# Altium PCB Main.PcbDoc (part 2 of 4)
Units mm, origin at the board's own origin, x right, y up, seen from the top; angles counter-clockwise.
Board outline 282.3 x 31.89 mm, 2 copper layers (Top Layer, Bottom Layer); 208 components, 197 nets, 886 pads, 366 vias.
Unrouted connection lines stored in the file: 118.
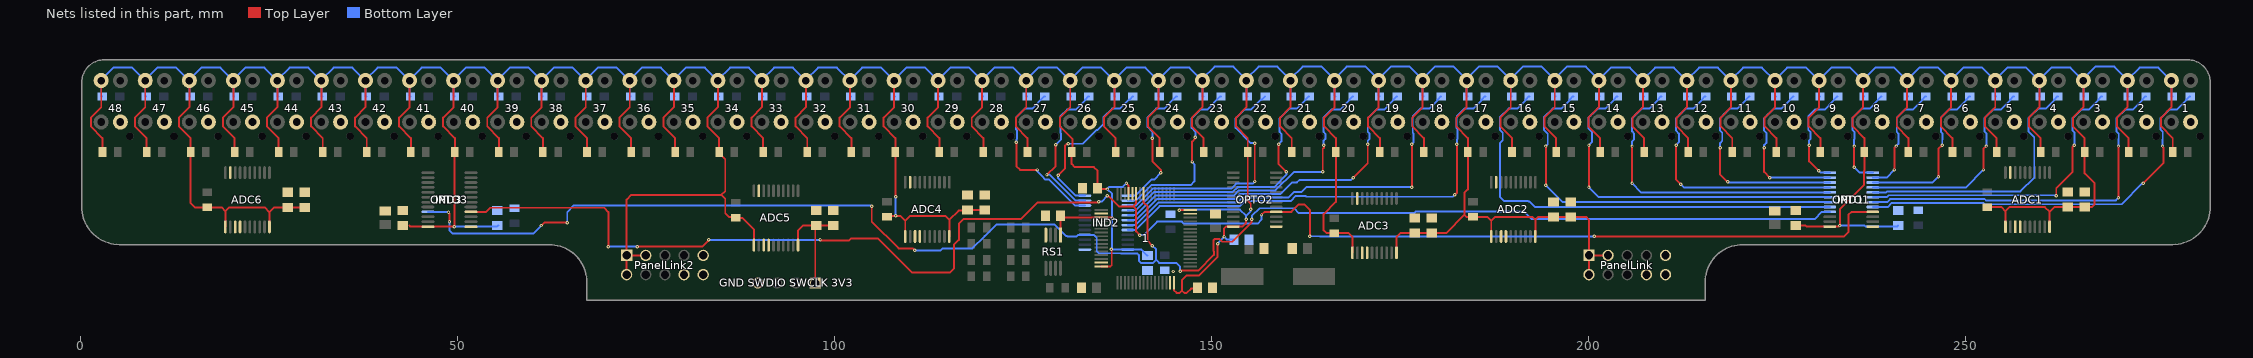
[diagram p2: the nets of this part, all layers, seen from the top]

## Footprints (in the part's own frame and the unit in brackets; to place one, negate y for a bottom-side part, rotate by r counter-clockwise, add the part's x,y. Pads: shape width x height; smd on the part's side, far side on the other; paste and mask are expansions set on the pad) (continued)
LQFP64 [mil]
  rect 10x70 smd: 1(-147.5,-232.34) 2(-127.82,-232.34) 3(-108.13,-232.34) 4(-88.45,-232.34) 5(-68.76,-232.34) 6(-49.08,-232.34) 7(-29.39,-232.34) 8(-9.71,-232.34) 9(9.98,-232.34) 10(29.66,-232.34) 11(49.35,-232.34) 12(69.03,-232.34) 13(88.72,-232.34) 14(108.4,-232.34) 15(128.09,-232.34) 16(147.77,-232.34) 33(147.77,232.34) 34(128.09,232.34) 35(108.4,232.34) 36(88.72,232.34) 37(69.03,232.34) 38(49.35,232.34) 39(29.66,232.34) 40(9.98,232.34) 41(-9.71,232.34) 42(-29.39,232.34) 43(-49.08,232.34) 44(-68.76,232.34) 45(-88.45,232.34) 46(-108.13,232.34) 47(-127.82,232.34) 48(-147.5,232.34)
  rect 70x10 smd: 17(232.34,-147.77) 18(232.34,-128.09) 19(232.34,-108.4) 20(232.34,-88.72) 21(232.34,-69.03) 22(232.34,-49.35) 23(232.34,-29.66) 24(232.34,-9.98) 25(232.34,9.71) 26(232.34,29.39) 27(232.34,49.08) 28(232.34,68.76) 29(232.34,88.45) 30(232.34,108.13) 31(232.34,127.82) 32(232.34,147.5) 49(-232.34,147.78) 50(-232.34,128.09) 51(-232.34,108.41) 52(-232.34,88.72) 53(-232.34,69.04) 54(-232.34,49.35) 55(-232.34,29.67) 56(-232.34,9.98) 57(-232.34,-9.7) 58(-232.34,-29.39) 59(-232.34,-49.07) 60(-232.34,-68.76) 61(-232.34,-88.44) 62(-232.34,-108.13) 63(-232.34,-127.81) 64(-232.34,-147.5)
  silkscreen extent -194,-292 191,193
NSOIC-8 [mm]
  rect 2x0.4 smd: 1(0,0)
  oval 2x0.4 smd: 2(0,-0.65) 3(0,-1.3) 4(0,-1.95) 5(4.4,-1.95) 6(4.4,-1.3) 7(4.4,-0.65) 8(4.4,0)
  silkscreen extent 1.27,-2.28 2.56,0.33
TCRT5000_NO_HOLE [mm]
  round 1 hole 1: 1(-4.65,-2.64)
  round 2 hole 1: A(2.75,1.17) C(-2.75,1.17) E(-2.75,-1.37) K(2.75,-1.37)
  silkscreen extent -5.35,-3.75 5.35,3.55, body extent -5.1,-3.65 5.1,3.35, height 7.02

## Part data
1: library part STM32F4R_64PIN_FOXCAR, Package=LQFP64, DeviceSetName=STM32F4R_64PIN_FOXCAR, GateName_1=G$1, LibraryName=stm32f4, SymbolName_1=STM32F4_64PINS_FOXCARV1
1 2 3 4 5 6 7 8 9 10 11 12 13 14 15 16 17 18 19 20 21 22 23 24 25 26 27 28 29 30 31 32 33 34 35 36 37 38 39 40 41 42 43 44 45 46 47 48: "Reflective Photo Interrupter, Phototransistor, Through Hole, 15 mm, 60 mA, 5 Vr, 1.25 Vf"
ADC1 ADC2 ADC3 ADC4 ADC5 ADC6: "Analogue to Digital Converter, Low Power, 8 bit, 50 kSPS, Single, 2.7 V, 5.5 V, SSOP"
C1 C1 C1 C2 C3 C3 C3 C3 C3 C3 C5 C6 C7 C7 C7 C8: library part "CAP 100nF", "Capacitor", Tolerance=+80%/-20%, Voltage=25V, Name="SMD Multilayer Ceramic Capacitor, 0805", Reference=1759167, Supplier=Farnell
C4 C4 C4 C4 C4 C4: library part "CAP 1uF", "Capacitor", Tolerance=+80%/-20%, Voltage=25V, Name="SMD Multilayer Ceramic Capacitor, 0805", Reference=1828853, Supplier=Farnell
C_quartz1 C_quartz2: library part "CAP 22pF", "Capacitor", Tolerance=5%, Voltage=50V, Name="SMD Multilayer Ceramic Capacitor, 0805", Reference=1759195, Supplier=Farnell
"GND SWDIO SWCLK 3V3": library part Connector_4pin, "4pin Connector"
IND1 IND2 IND3 OPTO1 OPTO2 OPTO3: "Led Driver, 16 Outputs, Constant Current, 3V-5.5V in, 30MHz switch, 20V/100mA out, TSSOP-24"
L1_IndicatorLED1 L1_IndicatorLED2 L1_IndicatorLED3 L1_IndicatorLED4 L1_IndicatorLED5 L1_IndicatorLED6 L1_IndicatorLED7 L1_IndicatorLED8 L1_IndicatorLED9 L1_IndicatorLED10 L1_IndicatorLED11 L1_IndicatorLED12 L1_IndicatorLED13 L1_IndicatorLED14 L1_IndicatorLED15 L1_IndicatorLED16 L1_IndicatorLED17 L1_IndicatorLED18 L1_IndicatorLED19 L1_IndicatorLED20 L1_IndicatorLED21 L1_IndicatorLED22 L1_IndicatorLED23 L1_IndicatorLED24 L1_IndicatorLED25 L1_IndicatorLED26 L1_IndicatorLED27 L1_IndicatorLED28 L1_IndicatorLED29 L1_IndicatorLED30 L1_IndicatorLED31 L1_IndicatorLED32 L1_IndicatorLED33 L1_IndicatorLED34 L1_IndicatorLED35 L1_IndicatorLED36 L1_IndicatorLED37 L1_IndicatorLED38 L1_IndicatorLED39 L1_IndicatorLED40 L1_IndicatorLED41 L1_IndicatorLED42 L1_IndicatorLED43 L1_IndicatorLED44 L1_IndicatorLED45 L1_IndicatorLED46 L1_IndicatorLED47 L1_IndicatorLED48: "LED, Low Power, Red, SMD, 2 mA, 1.95 V, 630 nm"
R1 R1 R1: library part "RES 8K2", "Resistor", Power=125mW, Tolerance=5%, Name="YAGEO (PHYCOMP)  RC0805JR-078K2L  SMD Chip Resistor, Thick Film, 8.2 kohm", Reference=9234128, Supplier=Farnell
R2_LightSensor1 R2_LightSensor2 R2_LightSensor3 R2_LightSensor4 R2_LightSensor5 R2_LightSensor6 R2_LightSensor7 R2_LightSensor8 R2_LightSensor9 R2_LightSensor10 R2_LightSensor11 R2_LightSensor12 R2_LightSensor13 R2_LightSensor14 R2_LightSensor15 R2_LightSensor16 R2_LightSensor17 R2_LightSensor18 R2_LightSensor19 R2_LightSensor20 R2_LightSensor21 R2_LightSensor22 R2_LightSensor23 R2_LightSensor24 R2_LightSensor25 R2_LightSensor26 R2_LightSensor27 R2_LightSensor28 R2_LightSensor29 R2_LightSensor30 R2_LightSensor31 R2_LightSensor32 R2_LightSensor33 R2_LightSensor34 R2_LightSensor35 R2_LightSensor36 R2_LightSensor37 R2_LightSensor38 R2_LightSensor39 R2_LightSensor40 R2_LightSensor41 R2_LightSensor42 R2_LightSensor43 R2_LightSensor44 R2_LightSensor45 R2_LightSensor46 R2_LightSensor47 R2_LightSensor48 R_boot: library part "RES 10K", "Resistor", Power=125mW, Tolerance=5%, Name="YAGEO (PHYCOMP)  RC0805JR-0710KL  SMD Chip Resistor, Thick Film, 10 kohm", Reference=9234136, Supplier=Farnell
R3 R3 R3: "RES, THICK FILM, 806R, 1%, 0.125W, 0805", Resistance="800 ohm"
R4: library part "RES 120R", "Resistor", Power=125mW, Tolerance=5%, Name="YAGEO (PHYCOMP)  RC0805JR-07120RL  SMD Chip Resistor, Thick Film, 120 ohm", Reference=9233890, Supplier=Farnell
R5 R7 R8 R9 R10 R11 R12 R13: library part RES, "Resistor"
R6 R6 R6 R6 R6 R6: library part "RES 1K", "Resistor", Power=125mW, Tolerance=5%, Name="YAGEO (PHYCOMP)  RC0805JR-071KL  SMD Chip Resistor, Thick Film, 1 kohm", Reference=9234004, Supplier=Farnell
RS1: library part ISL83071, "RS-422 transceiver 3V3"
X1: library part Crystal, "Quarz Crystal"

## Via types
v1: diameter 0.45, hole 0.2, Top Layer to Bottom Layer, 362 vias
v2: diameter 5.5, hole 3.2, Top Layer to Bottom Layer, 4 vias

## Nets (pads, with @x,y where several pads share a name; then routed paths per layer and width w, separated by ;. In a path a pad name is that pad's centre, name@x,y a point inside that pad or via, vN(x,y) a via of type N, cw(c..) or ccw(c..) an arc to the next point about the centre after c; other vN are vias at no path point)
3V3: 1.13 1.19 1.32 1.48 1.64 1.A 2.A 3.A 4.A 5.A 6.A 7.A 8.A 9.A 10.A 11.A 12.A 13.A 14.A 15.A 16.A 17.A 18.A 19.A 20.A 21.A 22.A 23.A 24.A 25.A 26.A 27.A 28.A 29.A 30.A 31.A 32.A 33.A 34.A 35.A 36.A 37.A 38.A 39.A 40.A 41.A 42.A 43.A 44.A 45.A 46.A 47.A 48.A "GND SWDIO SWCLK 3V3.1" ADC1.11 ADC1.20 ADC2.11 ADC2.20 ADC3.11 ADC3.20 ADC4.11 ADC4.20 ADC5.11 ADC5.20 ADC6.11 ADC6.20 C1.2 C2.2 C3.2 C4.2 C5.2 C6.1 C7.2 IND1.24 IND2.24 IND3.24 L1_IndicatorLED1.A L1_IndicatorLED2.A L1_IndicatorLED3.A L1_IndicatorLED4.A L1_IndicatorLED5.A L1_IndicatorLED6.A L1_IndicatorLED7.A L1_IndicatorLED8.A L1_IndicatorLED9.A L1_IndicatorLED10.A L1_IndicatorLED11.A L1_IndicatorLED12.A L1_IndicatorLED13.A L1_IndicatorLED14.A L1_IndicatorLED15.A L1_IndicatorLED16.A L1_IndicatorLED17.A L1_IndicatorLED18.A L1_IndicatorLED19.A L1_IndicatorLED20.A L1_IndicatorLED21.A L1_IndicatorLED22.A L1_IndicatorLED23.A L1_IndicatorLED24.A L1_IndicatorLED25.A L1_IndicatorLED26.A L1_IndicatorLED27.A L1_IndicatorLED28.A L1_IndicatorLED29.A L1_IndicatorLED30.A L1_IndicatorLED31.A L1_IndicatorLED32.A L1_IndicatorLED33.A L1_IndicatorLED34.A L1_IndicatorLED35.A L1_IndicatorLED36.A L1_IndicatorLED37.A L1_IndicatorLED38.A L1_IndicatorLED39.A L1_IndicatorLED40.A L1_IndicatorLED41.A L1_IndicatorLED42.A L1_IndicatorLED43.A L1_IndicatorLED44.A L1_IndicatorLED45.A L1_IndicatorLED46.A L1_IndicatorLED47.A L1_IndicatorLED48.A OPTO1.24 OPTO2.24 OPTO3.24 PanelLink2.1 PanelLink2.2 PanelLink2.3 PanelLink.1 PanelLink.2 PanelLink.3 R2_LightSensor1.2 R2_LightSensor2.2 R2_LightSensor3.2 R2_LightSensor4.2 R2_LightSensor5.2 R2_LightSensor6.2 R2_LightSensor7.2 R2_LightSensor8.2 R2_LightSensor9.2 R2_LightSensor10.2 R2_LightSensor11.2 R2_LightSensor12.2 R2_LightSensor13.2 R2_LightSensor14.2 R2_LightSensor15.2 R2_LightSensor16.2 R2_LightSensor17.2 R2_LightSensor18.2 R2_LightSensor19.2 R2_LightSensor20.2 R2_LightSensor21.2 R2_LightSensor22.2 R2_LightSensor23.2 R2_LightSensor24.2 R2_LightSensor25.2 R2_LightSensor26.2 R2_LightSensor27.2 R2_LightSensor28.2 R2_LightSensor29.2 R2_LightSensor30.2 R2_LightSensor31.2 R2_LightSensor32.2 R2_LightSensor33.2 R2_LightSensor34.2 R2_LightSensor35.2 R2_LightSensor36.2 R2_LightSensor37.2 R2_LightSensor38.2 R2_LightSensor39.2 R2_LightSensor40.2 R2_LightSensor41.2 R2_LightSensor42.2 R2_LightSensor43.2 R2_LightSensor44.2 R2_LightSensor45.2 R2_LightSensor46.2 R2_LightSensor47.2 R2_LightSensor48.2 R6.2 RS1.1 | length 1293.1
  Top Layer w0.254: 48.A@2.707,39.42 2.707,35.873 1.326,34.492 1.326,33.348 2.877,31.797 R2_LightSensor48.2@2.877,29.939 ; 47.A@8.549,39.42 8.549,35.873 7.168,34.492 7.168,33.348 8.719,31.797 R2_LightSensor47.2@8.719,29.939 ; 46.A@14.391,39.42 14.391,35.873 13.01,34.492 13.01,33.348 14.561,31.797 R2_LightSensor46.2@14.561,29.939 14.561,23.158 15.113,22.606 R6.2@16.764,22.606 18.669,22.606 19.177,22.098 ; ADC6.11@19.173,20.006 19.177,20.01 19.177,22.098 ; 45.A@20.233,39.42 20.233,35.873 18.852,34.492 18.852,33.348 20.403,31.797 R2_LightSensor45.2@20.403,29.939 ; ADC6.20@25.023,20.006 25.023,21.975 ; 44.A@26.075,39.42 26.075,35.873 24.694,34.492 24.694,33.348 26.245,31.797 R2_LightSensor44.2@26.245,29.939 ; C4.2@29.718,22.606 C3.2@27.432,22.606 25.654,22.606 25.023,21.975 ; 43.A@31.917,39.42 31.917,35.873 30.536,34.492 30.536,33.348 32.087,31.797 R2_LightSensor43.2@32.087,29.939 ; 42.A@37.759,39.42 37.759,35.873 36.378,34.492 36.378,33.348 37.929,31.797 R2_LightSensor42.2@37.929,29.939 ; 43.561,20.209 43.723,20.047 OPTO3.24@46.045,20.047 v1(49.549,20.047) 49.549,29.875 R2_LightSensor40.2@49.613,29.939 49.613,31.797 48.062,33.348 48.062,34.492 49.443,35.873 40.A@49.443,39.42 ; 41.A@43.601,39.42 43.601,35.873 42.22,34.492 42.22,33.348 43.771,31.797 R2_LightSensor41.2@43.771,29.939 ; 39.A@55.285,39.42 55.285,35.873 53.904,34.492 53.904,33.348 55.455,31.797 R2_LightSensor39.2@55.455,29.939 ; 38.A@61.127,39.42 61.127,35.873 59.746,34.492 59.746,33.348 61.297,31.797 R2_LightSensor38.2@61.297,29.939 ; 37.A@66.969,39.42 66.969,35.873 65.588,34.492 65.588,33.348 67.139,31.797 R2_LightSensor37.2@67.139,29.939 ; PanelLink2.2@72.39,13.673 PanelLink2.1@72.39,16.233 ; 36.A@72.811,39.42 72.811,35.873 71.43,34.492 71.43,33.348 72.981,31.797 R2_LightSensor36.2@72.981,29.939 ; PanelLink2.3@74.93,16.233 PanelLink2.1@72.39,16.233 ; 35.A@78.653,39.42 78.653,35.873 77.272,34.492 77.272,33.348 78.823,31.797 R2_LightSensor35.2@78.823,29.939 ; 34.A@84.495,39.42 84.495,35.873 83.114,34.492 83.114,33.348 84.665,31.797 84.665,29.789 85.471,28.983 85.471,24.765 84.963,24.257 ; ADC5.11@89.281,17.597 89.281,19.685 87.75,21.216 86.877,21.216 R6.2@86.868,21.225 86.78,21.313 85.986,21.313 85.471,21.828 85.471,23.749 84.963,24.257 ; 33.A@90.337,39.42 90.337,35.873 88.956,34.492 88.956,33.348 90.507,31.797 R2_LightSensor33.2@90.507,29.939 ; ADC5.20@95.127,17.593 95.127,19.562 95.758,20.193 C3.2@97.536,20.193 ; 32.A@96.179,39.42 96.179,35.873 94.798,34.492 94.798,33.348 96.349,31.797 R2_LightSensor32.2@96.349,29.939 ; 97.409,12.573 97.409,20.066 C3.2@97.536,20.193 ; C4.2@99.822,20.193 C3.2@97.536,20.193 ; 31.A@102.021,39.42 102.021,35.873 100.64,34.492 100.64,33.348 102.191,31.797 R2_LightSensor31.2@102.191,29.939 ; R6.2@106.934,21.336 107.061,21.463 v1(108.077,21.463) 108.712,21.463 109.347,20.828 ; 30.A@107.863,39.42 107.863,35.873 106.482,34.492 106.482,33.348 108.033,31.797 R2_LightSensor30.2@108.033,29.939 108.077,29.895 v1(108.077,24.003) ; ADC4.11@109.347,18.74 109.347,20.828 ; 29.A@113.705,39.42 113.705,35.873 112.324,34.492 112.324,33.348 113.875,31.797 R2_LightSensor29.2@113.875,29.939 R2_LightSensor29.2@113.905,29.909 ; ADC4.20@115.193,18.736 115.193,20.941 ; 28.A@119.547,39.42 119.547,35.873 118.166,34.492 118.166,33.348 119.717,31.797 R2_LightSensor28.2@119.717,29.939 119.717,29.789 R2_LightSensor28.2@120.09,29.416 ; C4.2@119.915,22.268 C4.2@119.888,22.241 C3.2@117.602,22.241 117.543,22.182 116.416,22.182 116.416,22.164 115.193,20.941 ; 27.A@125.389,39.42 125.389,35.873 124.008,34.492 124.008,33.348 125.559,31.797 R2_LightSensor27.2@125.559,29.939 ; C6.1@129.921,21.463 C6.1@129.936,21.448 ; RS1.1@129.936,18.923 C6.1@129.936,21.448 ; 26.A@131.231,39.42 131.231,35.873 129.85,34.492 129.85,33.348 131.534,31.664 131.534,30.072 R2_LightSensor26.2@131.401,29.939 131.401,28.365 131.826,27.94 134.366,27.94 134.858,27.448 C2.2@134.858,25.146 134.972,25.032 v1(136.131,25.032) ; 1.32@135.323,14.762 136.555,14.762 136.735,14.942 136.735,16.916 136.686,16.965 v1(136.686,17.062) ; v1(136.779,21.165) 136.682,21.262 1.19@135.323,21.262 130.122,21.262 C6.1@129.936,21.448 ; 25.A@137.073,39.42 137.073,35.873 135.692,34.492 135.692,33.348 137.243,31.797 R2_LightSensor25.2@137.243,29.939 R2_LightSensor25.2@137.243,29.789 ; v1(138.684,25.781) 138.971,25.494 1.13@138.971,24.41 ; 24.A@142.915,39.42 142.915,35.873 141.534,34.492 141.534,33.348 143.085,31.797 R2_LightSensor24.2@143.085,29.939 ; 1.48@144.971,12.608 144.971,11.62 145.342,11.249 145.742,11.249 146.05,11.557 ; v1(145.669,22.225) 145.699,22.255 1.64@147.126,22.255 ; C5.2@148.098,11.938 147.99,11.83 147.266,11.83 146.685,11.249 146.358,11.249 146.05,11.557 ; 23.A@148.757,39.42 148.757,35.873 147.376,34.492 147.376,33.348 148.927,31.797 R2_LightSensor23.2@148.927,29.939 ; v1(150.793,17.78) 150.755,17.742 150.755,17.604 150.749,17.597 150.749,16.009 148.329,13.589 146.685,13.589 146.05,12.954 146.05,11.557 ; v1(151.629,18.678) 151.638,18.688 151.638,19.812 151.873,20.047 OPTO2.24@152.852,20.047 152.866,20.061 154.046,20.061 154.559,20.574 v1(154.559,20.999) ; 22.A@154.599,39.42 154.599,35.873 153.218,34.492 153.218,33.348 154.769,31.797 R2_LightSensor22.2@154.769,29.939 154.769,23.493 155.171,23.091 155.171,22.375 v1(155.194,22.352) ; 21.A@160.441,39.42 160.441,35.873 159.06,34.492 159.06,33.348 160.611,31.797 R2_LightSensor21.2@160.611,29.939 ; 20.A@166.283,39.42 166.283,35.873 164.902,34.492 164.902,33.348 166.453,31.797 R2_LightSensor20.2@166.453,29.939 166.453,23.324 164.846,21.717 164.846,19.558 165.227,19.177 R6.2@166.243,19.177 168.148,19.177 168.656,18.669 168.656,16.581 ADC3.11@168.652,16.577 ; 19.A@172.125,39.42 172.125,35.873 170.744,34.492 170.744,33.348 172.295,31.797 R2_LightSensor19.2@172.295,29.939 ; ADC3.20@174.502,16.577 174.502,18.673 175.006,19.177 C3.2@176.911,19.177 C4.2@179.197,19.177 181.102,19.177 183.515,21.59 ; 18.A@177.967,39.42 177.967,35.873 176.586,34.492 176.586,33.348 178.137,31.797 R2_LightSensor18.2@178.137,29.939 ; 17.A@183.809,39.42 183.809,35.873 182.428,34.492 182.428,33.348 183.979,31.797 R2_LightSensor17.2@183.979,29.939 183.979,24.975 183.515,24.511 183.515,21.59 ; ADC2.11@187.071,18.74 187.071,20.828 ; 16.A@189.651,39.42 189.651,35.873 188.27,34.492 188.27,33.348 189.821,31.797 R2_LightSensor16.2@189.821,29.939 ; ADC2.20@192.917,18.736 192.917,20.955 ; 15.A@195.493,39.42 195.493,35.873 194.112,34.492 194.112,33.348 195.663,31.797 R2_LightSensor15.2@195.663,29.939 ; PanelLink.2@200.025,13.673 PanelLink.1@200.025,16.233 ; 14.A@201.335,39.42 201.335,35.873 199.954,34.492 199.954,33.348 201.505,31.797 R2_LightSensor14.2@201.505,29.939 ; PanelLink.3@202.565,16.233 PanelLink.1@200.025,16.233 ; 13.A@207.177,39.42 207.177,35.873 205.796,34.492 205.796,33.348 207.347,31.797 R2_LightSensor13.2@207.347,29.939 ; 12.A@213.019,39.42 213.019,35.873 211.638,34.492 211.638,33.348 213.189,31.797 R2_LightSensor12.2@213.189,29.939 ; 11.A@218.861,39.42 218.861,35.873 217.48,34.492 217.48,33.348 219.031,31.797 R2_LightSensor11.2@219.031,29.939 ; 10.A@224.703,39.42 224.703,35.873 223.322,34.492 223.322,33.348 224.873,31.797 R2_LightSensor10.2@224.873,29.939 ; C7.2@227.398,20.15 C7.2@227.457,20.209 228.727,20.209 228.889,20.047 OPTO1.24@231.973,20.047 233.153,20.047 v1(233.299,20.193) 233.299,22.352 236.496,25.549 236.496,27.405 236.557,27.466 R2_LightSensor8.2@236.557,29.939 236.557,31.797 235.006,33.348 235.006,34.492 236.387,35.873 8.A@236.387,39.42 ; 9.A@230.545,39.42 230.545,35.873 229.164,34.492 229.164,33.348 230.715,31.797 R2_LightSensor9.2@230.715,29.939 ; 7.A@242.229,39.42 242.229,35.873 240.848,34.492 240.848,33.348 242.399,31.797 R2_LightSensor7.2@242.399,29.939 ; 6.A@248.071,39.42 248.071,35.873 246.69,34.492 246.69,33.348 248.241,31.797 R2_LightSensor6.2@248.241,29.939 ; R6.2@252.857,22.622 254.762,22.622 255.27,22.114 ; 5.A@253.913,39.42 253.913,35.873 252.532,34.492 252.532,33.348 254.083,31.797 R2_LightSensor5.2@254.083,29.939 ; ADC1.11@255.27,20.026 255.27,22.114 ; 4.A@259.755,39.42 259.755,35.873 258.374,34.492 258.374,33.348 259.925,31.797 R2_LightSensor4.2@259.925,29.939 ; ADC1.20@261.116,20.022 261.116,21.991 ; 3.A@265.597,39.42 265.597,35.873 264.216,34.492 264.216,33.348 265.767,31.797 R2_LightSensor3.2@265.767,29.939 265.767,27.095 267.081,25.781 267.081,22.987 266.716,22.622 C4.2@265.811,22.622 ; C4.2@265.965,22.776 C4.2@265.811,22.622 ; 2.A@271.439,39.42 271.439,35.873 270.058,34.492 270.058,33.348 271.609,31.797 R2_LightSensor2.2@271.609,29.939 ; 1.A@277.281,39.42 277.281,35.873 275.9,34.492 275.9,33.348 277.451,31.797 R2_LightSensor1.2@277.451,29.939 ; 19.177,22.098 19.685,22.606 24.392,22.606 25.023,21.975 ; PanelLink2.1@72.39,16.233 72.39,23.622 73.025,24.257 84.963,24.257 ; 109.347,20.828 109.982,21.463 114.671,21.463 115.193,20.941 ; 183.515,21.59 183.769,21.336 R6.2@184.658,21.336 186.563,21.336 187.071,20.828 ; 187.071,20.828 187.579,21.336 192.532,21.336 192.913,20.955 193.294,21.336 C3.2@195.326,21.336 C4.2@197.612,21.336 199.644,21.336 200.025,20.955 PanelLink.1@200.025,16.233 ; 255.27,22.114 255.778,22.622 260.485,22.622 261.116,21.991 ; 261.116,21.991 261.747,22.622 C3.2@263.525,22.622 C4.2@265.811,22.622
  Bottom Layer w0.254: 48.A@2.707,39.42 2.707,37.427 L1_IndicatorLED48.A@2.829,37.305 ; 48.A@2.707,39.537 4.318,41.148 6.821,41.148 47.A@8.549,39.42 8.549,37.427 L1_IndicatorLED47.A@8.671,37.305 ; 47.A@8.549,39.537 10.16,41.148 12.663,41.148 46.A@14.391,39.42 14.391,37.427 L1_IndicatorLED46.A@14.513,37.305 ; 46.A@14.391,39.537 16.002,41.148 18.505,41.148 45.A@20.233,39.42 20.233,37.427 L1_IndicatorLED45.A@20.355,37.305 ; 45.A@20.233,39.537 21.844,41.148 24.347,41.148 44.A@26.075,39.42 26.075,37.427 L1_IndicatorLED44.A@26.197,37.305 ; 44.A@26.075,39.537 27.686,41.148 30.189,41.148 43.A@31.917,39.42 31.917,37.427 L1_IndicatorLED43.A@32.039,37.305 ; 43.A@31.917,39.537 33.528,41.148 36.031,41.148 42.A@37.759,39.42 37.759,37.427 L1_IndicatorLED42.A@37.881,37.305 ; 42.A@37.759,39.537 39.37,41.148 41.873,41.148 41.A@43.601,39.42 43.601,37.427 L1_IndicatorLED41.A@43.723,37.305 ; 41.A@43.601,39.537 45.212,41.148 47.715,41.148 40.A@49.443,39.42 49.443,37.427 L1_IndicatorLED40.A@49.565,37.305 ; 40.A@49.443,39.537 51.054,41.148 53.557,41.148 39.A@55.285,39.42 55.285,37.427 L1_IndicatorLED39.A@55.407,37.305 ; v1(49.549,20.047) IND3.24@51.745,20.047 55.183,20.047 55.345,20.209 C1.2@55.372,20.182 ; 39.A@55.285,39.537 56.896,41.148 59.399,41.148 38.A@61.127,39.42 61.127,37.427 L1_IndicatorLED38.A@61.249,37.305 ; 38.A@61.127,39.537 62.738,41.148 65.241,41.148 37.A@66.969,39.42 66.969,37.427 L1_IndicatorLED37.A@67.091,37.305 ; 37.A@66.969,39.537 68.58,41.148 71.083,41.148 36.A@72.811,39.42 72.811,37.427 L1_IndicatorLED36.A@72.933,37.305 ; 36.A@72.811,39.537 74.422,41.148 76.925,41.148 35.A@78.653,39.42 78.653,37.427 L1_IndicatorLED35.A@78.775,37.305 ; 35.A@78.653,39.537 80.264,41.148 82.767,41.148 34.A@84.495,39.42 84.495,37.427 L1_IndicatorLED34.A@84.617,37.305 ; 34.A@84.495,39.537 86.106,41.148 88.609,41.148 33.A@90.337,39.42 90.337,37.427 L1_IndicatorLED33.A@90.459,37.305 ; 33.A@90.337,39.537 91.948,41.148 94.451,41.148 32.A@96.179,39.42 96.179,37.427 L1_IndicatorLED32.A@96.301,37.305 ; 32.A@96.179,39.537 97.79,41.148 100.293,41.148 31.A@102.021,39.42 102.021,37.427 L1_IndicatorLED31.A@102.143,37.305 ; 31.A@102.021,39.537 103.632,41.148 106.135,41.148 30.A@107.863,39.42 107.863,37.427 L1_IndicatorLED30.A@107.985,37.305 ; 30.A@107.863,39.537 109.474,41.148 111.977,41.148 29.A@113.705,39.42 113.705,37.427 L1_IndicatorLED29.A@113.827,37.305 ; v1(108.077,21.463) v1(108.077,24.003) ; 29.A@113.705,39.537 115.316,41.148 117.819,41.148 28.A@119.547,39.42 119.547,37.427 L1_IndicatorLED28.A@119.669,37.305 ; 28.A@119.547,39.537 121.158,41.148 123.661,41.148 27.A@125.389,39.42 125.389,37.427 L1_IndicatorLED27.A@125.511,37.305 ; 27.A@125.389,39.537 127,41.148 129.503,41.148 26.A@131.231,39.42 131.231,37.427 L1_IndicatorLED26.A@131.353,37.305 ; 26.A@131.231,39.537 132.842,41.148 135.345,41.148 25.A@137.073,39.42 137.073,37.427 L1_IndicatorLED25.A@137.195,37.305 ; v1(136.686,17.062) 136.724,17.024 136.866,17.024 136.891,16.999 IND2.24@138.867,16.999 140.669,16.999 140.905,16.763 140.905,16.713 141.378,16.24 C1.2@141.478,16.24 ; v1@136.779,17.111 v1(136.779,21.165) 136.779,24.384 v1(136.131,25.032) 136.408,25.308 138.211,25.308 v1(138.684,25.781) ; 25.A@137.073,39.537 138.684,41.148 141.187,41.148 24.A@142.915,39.42 142.915,37.427 L1_IndicatorLED24.A@143.037,37.305 ; 24.A@142.915,39.537 144.526,41.148 147.029,41.148 23.A@148.757,39.42 148.757,37.427 L1_IndicatorLED23.A@148.879,37.305 ; v1(145.669,22.225) 145.746,22.302 153.72,22.302 154.559,21.463 ; 23.A@148.757,39.654 150.368,41.265 152.871,41.265 22.A@154.599,39.537 ; v1(150.793,17.78) 150.793,17.843 v1(151.629,18.678) 151.965,18.342 152.87,18.342 C7.2@152.924,18.288 ; v1(154.559,20.999) 154.559,21.463 ; 22.A@154.599,39.42 154.599,37.427 L1_IndicatorLED22.A@154.721,37.305 ; 22.A@154.599,39.654 156.21,41.265 158.713,41.265 21.A@160.441,39.537 ; v1(155.194,22.352) 155.156,22.314 155.156,22.06 154.559,21.463 ; 21.A@160.441,39.42 160.441,37.427 L1_IndicatorLED21.A@160.563,37.305 ; 21.A@160.441,39.654 162.052,41.265 164.555,41.265 20.A@166.283,39.537 ; 20.A@166.283,39.42 166.283,37.427 L1_IndicatorLED20.A@166.405,37.305 ; 20.A@166.283,39.654 167.894,41.265 170.397,41.265 19.A@172.125,39.537 ; 19.A@172.125,39.42 172.125,37.427 L1_IndicatorLED19.A@172.247,37.305 ; 19.A@172.125,39.654 173.736,41.265 176.239,41.265 18.A@177.967,39.537 ; 18.A@177.967,39.42 177.967,37.427 L1_IndicatorLED18.A@178.089,37.305 ; 18.A@177.967,39.654 179.578,41.265 182.081,41.265 17.A@183.809,39.537 ; 17.A@183.809,39.42 183.809,37.427 L1_IndicatorLED17.A@183.931,37.305 ; 17.A@183.809,39.654 185.42,41.265 187.923,41.265 16.A@189.651,39.537 ; 16.A@189.651,39.42 189.651,37.427 L1_IndicatorLED16.A@189.773,37.305 ; 16.A@189.651,39.654 191.262,41.265 193.765,41.265 15.A@195.493,39.537 ; 15.A@195.493,39.42 195.493,37.427 L1_IndicatorLED15.A@195.615,37.305 ; 15.A@195.493,39.654 197.104,41.265 199.607,41.265 201.335,39.537 202.946,41.148 205.449,41.148 13.A@207.177,39.42 207.177,37.427 L1_IndicatorLED13.A@207.299,37.305 ; 14.A@201.335,39.42 201.335,37.427 L1_IndicatorLED14.A@201.457,37.305 ; 13.A@207.177,39.537 208.788,41.148 211.291,41.148 12.A@213.019,39.42 213.019,37.427 L1_IndicatorLED12.A@213.141,37.305 ; 12.A@213.019,39.537 214.63,41.148 217.133,41.148 11.A@218.861,39.42 218.861,37.427 L1_IndicatorLED11.A@218.983,37.305 ; 11.A@218.861,39.537 220.472,41.148 222.975,41.148 10.A@224.703,39.42 224.703,37.427 L1_IndicatorLED10.A@224.825,37.305 ; 10.A@224.703,39.537 226.314,41.148 228.817,41.148 9.A@230.545,39.42 230.545,37.427 L1_IndicatorLED9.A@230.667,37.305 ; 9.A@230.545,39.537 232.156,41.148 234.659,41.148 8.A@236.387,39.42 236.387,37.427 L1_IndicatorLED8.A@236.509,37.305 ; v1(233.299,20.193) 236.601,20.193 236.733,20.061 237.659,20.061 IND1.24@237.673,20.047 240.884,20.047 C1.2@241.046,20.209 ; 8.A@236.387,39.537 237.998,41.148 240.501,41.148 7.A@242.229,39.42 242.229,37.427 L1_IndicatorLED7.A@242.351,37.305 ; 7.A@242.229,39.537 243.84,41.148 246.343,41.148 6.A@248.071,39.42 248.071,37.427 L1_IndicatorLED6.A@248.193,37.305 ; 6.A@248.071,39.537 249.682,41.148 252.185,41.148 5.A@253.913,39.42 253.913,37.427 L1_IndicatorLED5.A@254.035,37.305 ; 5.A@253.913,39.537 255.524,41.148 258.027,41.148 4.A@259.755,39.42 259.755,37.427 L1_IndicatorLED4.A@259.877,37.305 ; 4.A@259.755,39.537 261.366,41.148 263.869,41.148 3.A@265.597,39.42 265.597,37.427 L1_IndicatorLED3.A@265.719,37.305 ; 3.A@265.597,39.654 267.208,41.265 269.711,41.265 2.A@271.439,39.537 ; L1_IndicatorLED2.A@271.561,37.305 271.439,37.427 2.A@271.439,39.42 2.A@271.439,39.537 ; L1_IndicatorLED1.A@277.403,37.305 277.281,37.427 1.A@277.281,39.42 275.553,41.148 273.05,41.148 2.A@271.439,39.537
GND: 1.12 1.18 1.31 1.47 1.63 1.E 2.E 3.E 4.E 5.E 6.E 7.E 8.E 9.E 10.E 11.E 12.E 13.E 14.E 15.E 16.E 17.E 18.E 19.E 20.E 21.E 22.E 23.E 24.E 25.E 26.E 27.E 28.E 29.E 30.E 31.E 32.E 33.E 34.E 35.E 36.E 37.E 38.E 39.E 40.E 41.E 42.E 43.E 44.E 45.E 46.E 47.E 48.E "GND SWDIO SWCLK 3V3.4" ADC1.9 ADC1.13 ADC1.14 ADC2.9 ADC2.13 ADC2.14 ADC3.9 ADC3.13 ADC3.14 ADC4.9 ADC4.13 ADC4.14 ADC5.9 ADC5.13 ADC5.14 ADC6.9 ADC6.13 ADC6.14 C1.1 C2.1 C3.1 C4.1 C5.1 C6.2 C7.1 C8.1 C_quartz1.1 C_quartz2.1 IND1.1 IND2.1 IND3.1 OPTO1.1 OPTO2.1 OPTO3.1 PanelLink2.8 PanelLink2.9 PanelLink2.10 PanelLink.8 PanelLink.9 PanelLink.10 R1.2 R3.2 R_boot.1 RS1.4
  other v1: 144.907,14.097
LE_IND: 1.9 IND1.4 IND2.4 IND3.4 | length 217
  Top Layer w0.254: v1(48.768,21.971) 48.768,21.918 48.895,21.791 v1(48.895,20.701) ; v1(61.087,20.193) 61.468,20.574 v1(64.516,20.574) ; v1@104.775,22.733 v1(104.902,22.733) 104.902,20.708 108.465,17.145 110.363,17.145 v1(110.617,16.891) ; 1.9@140.971,24.41 140.971,23.24 141.478,22.733 141.478,18.161 v1(142.113,17.526) ; v1(145.796,14.141) 145.849,14.141 145.932,14.224 148.228,14.224 150.285,16.281 150.285,16.739 150.241,16.783 150.241,18.266 150.39,18.415 151.003,18.415 151.384,18.034 152.688,18.034 155.291,20.636 155.291,20.925 155.321,20.955 v1(155.321,20.999)
  Bottom Layer w0.254: IND3.4@46.045,21.997 48.742,21.997 v1(48.768,21.971) ; v1(48.895,20.701) 48.895,19.558 49.33,19.123 60.017,19.123 v1(61.087,20.193) ; v1(64.516,20.574) 64.516,21.971 65.405,22.86 104.722,22.86 104.849,22.733 v1(104.902,22.733) ; v1(110.617,16.891) 114.046,16.891 114.3,17.145 118.244,17.145 119.876,18.777 119.883,18.777 121.426,20.32 129.152,20.32 130.652,18.82 130.786,18.82 130.884,18.722 132.036,18.722 132.263,18.949 IND2.4@133.167,18.949 134.34,18.949 134.747,18.542 134.747,16.764 135.001,16.51 137.971,16.51 137.984,16.497 140.094,16.497 140.335,16.256 140.335,15.494 140.589,15.24 142.24,15.24 142.505,15.505 ; v1(142.113,17.526) 142.621,17.018 142.621,15.621 ; 142.505,15.505 142.621,15.621 ; v1(145.796,14.141) 145.796,14.732 145.288,15.24 143.002,15.24 142.621,15.621 ; v1(155.321,20.999) 155.321,21.463 156.337,22.479 160.909,22.479 161.537,21.851 176.853,21.851 177.028,22.025 191.469,22.025 192.451,21.043 192.507,21.043 192.512,21.038 229.953,21.038 230.902,21.987 231.963,21.987 IND1.4@231.973,21.997
LE_OPTO: 1.11 OPTO1.4 OPTO2.4 OPTO3.4 | length 215.2
  Top Layer w0.254: OPTO3.4@51.745,21.997 51.763,21.979 52.506,21.979 52.514,21.971 53.714,21.971 54.295,22.552 69.396,22.552 69.977,21.971 v1(69.977,17.399) ; v1(73.787,17.399) 82.423,17.399 83.268,18.244 v1(83.268,18.288) ; v1(98.044,18.288) 98.104,18.228 101.914,18.228 102.174,18.488 105.718,18.488 110.236,13.97 115.316,13.97 115.805,14.459 115.805,17.641 116.459,18.295 116.459,20.447 117.094,21.082 124.714,21.082 126.873,23.241 134.821,23.241 134.948,23.368 v1(135.001,23.368) ; v1(136.144,24.13) 136.197,24.13 136.295,24.032 136.371,24.032 137.447,22.956 137.447,22.954 137.668,22.733 139.573,22.733 ; 1.11@139.971,24.41 139.971,23.131 139.573,22.733 ; v1(140.472,18.923) 139.971,19.425 139.971,22.335 139.573,22.733 ; v1(156.591,21.59) 156.998,21.997 OPTO2.4@158.552,21.997 160.554,21.997 161.544,22.987 162.284,22.987 163.015,22.257 v1(163.015,18.767) ; v1(200.733,18.742) 233.88,18.742 234.442,19.304 234.442,21.59 234.849,21.997 OPTO1.4@237.673,21.997
  Bottom Layer w0.254: v1(69.977,17.399) v1(73.787,17.399) ; v1(83.268,18.288) v1(98.044,18.288) ; v1(135.001,23.368) 135.382,23.368 v1(136.144,24.13) ; v1(140.472,18.923) 140.97,18.923 142.748,20.701 146.05,20.701 146.304,20.447 156.083,20.447 156.591,20.955 v1(156.591,21.59) ; v1(163.015,18.767) 164.338,18.766 164.362,18.742 v1(200.733,18.742)
LED_IND1: IND1.20 L1_IndicatorLED1.K | length 52.4
  Top Layer w0.254: v1(273.529,25.781) 273.558,25.781 276.225,28.448 276.225,30.554 276.098,30.681 v1(276.098,30.734)
  Bottom Layer w0.254: IND1.20@237.673,22.647 239.645,22.647 240.188,23.19 252.314,23.19 252.488,23.016 270.666,23.016 273.431,25.781 v1(273.529,25.781) ; v1(276.098,30.734) 276.098,31.623 276.13,31.655 276.13,32.607 275.844,32.893 275.844,34.436 276.709,35.301 276.728,35.301 276.987,35.56 278.008,35.56 279.255,36.807 279.255,36.882 279.678,37.305 L1_IndicatorLED1.K@279.753,37.305
LED_IND2: IND1.19 L1_IndicatorLED2.K | length 48.8
  Top Layer w0.254: v1(270.256,23.876) v1(270.256,30.734)
  Bottom Layer w0.254: IND1.19@237.673,23.297 239.577,23.297 239.978,23.698 252.524,23.698 252.698,23.524 269.904,23.524 v1(270.256,23.876) ; v1(270.256,30.734) 270.256,31.623 270.288,31.655 270.288,32.385 270.018,32.655 270.018,34.452 271.126,35.56 272.166,35.56 273.413,36.807 273.413,36.882 273.836,37.305 L1_IndicatorLED2.K@273.911,37.305
LED_IND3: IND1.18 L1_IndicatorLED3.K | length 41
  Top Layer w0.254: v1(262.001,24.13) 262.001,25.146 264.16,27.305 264.16,30.607 v1(264.414,30.861)
  Bottom Layer w0.254: IND1.18@237.673,23.947 239.508,23.947 239.767,24.206 261.786,24.206 261.825,24.168 261.963,24.168 v1(262.001,24.13) ; v1(264.414,30.861) 264.414,31.623 264.446,31.655 264.446,32.48 264.16,32.766 264.16,34.436 265.025,35.301 265.044,35.301 265.303,35.56 266.324,35.56 267.571,36.807 267.571,36.882 267.994,37.305 L1_IndicatorLED3.K@268.069,37.305
LED_IND4: IND1.17 L1_IndicatorLED4.K | length 35.5
  Bottom Layer w0.254: IND1.17@237.673,24.597 239.44,24.597 239.557,24.714 257.251,24.714 259.08,26.543 259.08,31.909 258.334,32.655 258.334,34.452 259.183,35.301 259.202,35.301 259.588,35.687 260.609,35.687 261.729,36.807 261.729,36.882 262.152,37.305 L1_IndicatorLED4.K@262.227,37.305
LED_IND5: IND1.16 L1_IndicatorLED5.K | length 27.9
  Top Layer w0.254: v1(252.349,27.559) 252.349,30.353 v1(252.73,30.734)
  Bottom Layer w0.254: IND1.16@237.673,25.247 250.037,25.247 v1(252.349,27.559) ; v1@252.762,30.766 252.762,32.385 252.476,32.671 252.476,34.436 253.341,35.301 253.36,35.301 253.614,35.555 254.635,35.555 255.887,36.807 255.887,36.882 256.31,37.305 L1_IndicatorLED5.K@256.385,37.305
LED_IND6: IND1.15 L1_IndicatorLED6.K | length 22.2
  Top Layer w0.254: v1(246.38,26.67) 246.38,30.353 v1(246.888,30.861)
  Bottom Layer w0.254: IND1.15@237.673,25.897 245.607,25.897 v1(246.38,26.67) ; v1(246.888,30.861) 246.888,31.623 246.92,31.655 246.92,32.385 246.69,32.615 246.69,34.492 247.758,35.56 248.798,35.56 250.045,36.807 250.045,36.882 250.468,37.305 L1_IndicatorLED6.K@250.543,37.305
LED_IND7: IND1.14 L1_IndicatorLED7.K | length 15.6
  Top Layer w0.254: v1(240.538,27.559) 240.538,30.48 v1(240.792,30.734)
  Bottom Layer w0.254: IND1.14@237.673,26.547 237.677,26.543 239.522,26.543 v1(240.538,27.559) ; v1(240.792,30.734) 241.078,31.02 241.078,32.385 240.848,32.615 240.848,34.492 241.916,35.56 242.956,35.56 244.203,36.807 244.203,36.882 244.626,37.305 L1_IndicatorLED7.K@244.701,37.305
LED_IND8: IND1.13 L1_IndicatorLED8.K | length 14.5
  Top Layer w0.254: v1(235.204,27.94) v1(235.204,30.734)
  Bottom Layer w0.254: v1(235.204,27.94) 235.947,27.197 IND1.13@237.673,27.197 ; v1(235.204,30.734) 235.204,31.623 235.236,31.655 235.236,32.607 235.006,32.837 235.006,34.473 235.284,34.751 cw(c236.387,33.92) 235.556,35.023 236.22,35.687 237.241,35.687 238.361,36.807 238.361,36.882 238.784,37.305 L1_IndicatorLED8.K@238.859,37.305
LED_IND9: IND1.12 L1_IndicatorLED9.K | length 14.6
  Top Layer w0.254: v1(229.235,30.861) 229.235,28.702 v1(230.496,27.442)
  Bottom Layer w0.254: v1(229.235,30.861) 229.235,31.496 229.394,31.655 229.394,32.607 229.108,32.893 229.108,34.671 229.997,35.56 231.272,35.56 232.519,36.807 232.519,36.882 232.942,37.305 L1_IndicatorLED9.K@233.017,37.305 ; v1(230.496,27.442) 230.74,27.197 IND1.12@231.973,27.197
LED_IND10: IND1.11 L1_IndicatorLED10.K | length 21.5
  Top Layer w0.254: v1(223.266,30.48) 223.266,27.305 v1(224.028,26.543)
  Bottom Layer w0.254: v1(223.266,30.48) 223.266,30.861 223.552,31.147 223.552,32.48 223.266,32.766 223.266,34.417 223.6,34.751 cw(c224.703,33.92) 223.872,35.023 224.536,35.687 225.557,35.687 226.677,36.807 226.677,36.882 227.1,37.305 L1_IndicatorLED10.K@227.175,37.305 ; v1(224.028,26.543) 224.024,26.547 IND1.11@231.973,26.547
LED_IND11: IND1.10 L1_IndicatorLED11.K | length 27.9
  Top Layer w0.254: v1(217.424,30.48) 217.424,26.924 218.244,26.104 218.289,26.104 218.387,26.006 v1(218.44,26.006)
  Bottom Layer w0.254: v1(217.424,30.48) 217.424,31.115 217.71,31.401 217.71,32.48 217.424,32.766 217.424,34.417 217.758,34.751 cw(c218.861,33.92) 218.03,35.023 218.694,35.687 219.715,35.687 220.835,36.807 220.835,36.882 221.258,37.305 L1_IndicatorLED11.K@221.333,37.305 ; v1(218.44,26.006) 218.549,25.897 IND1.10@231.973,25.897
LED_IND12: IND1.9 L1_IndicatorLED12.K | length 34.4
  Top Layer w0.254: v1(211.582,30.861) 211.582,26.289 v1(212.217,25.654)
  Bottom Layer w0.254: v1(211.582,30.861) 211.963,31.242 211.963,32.385 211.582,32.766 211.582,34.417 211.916,34.751 cw(c213.019,33.92) 212.188,35.023 212.852,35.687 213.873,35.687 214.993,36.807 214.993,36.882 215.416,37.305 L1_IndicatorLED12.K@215.491,37.305 ; v1(212.217,25.654) 212.624,25.247 IND1.9@231.973,25.247
LED_IND13: IND1.8 L1_IndicatorLED13.K | length 40.7
  Top Layer w0.254: v1(205.74,25.781) v1(205.74,30.734)
  Bottom Layer w0.254: v1(205.74,25.781) 206.924,24.597 IND1.8@231.973,24.597 ; v1(205.74,30.734) 205.74,31.369 206.026,31.655 206.026,32.385 205.74,32.671 205.74,34.417 206.074,34.751 cw(c207.177,33.92) 206.346,35.023 207.01,35.687 208.031,35.687 209.151,36.807 209.151,36.882 209.574,37.305 L1_IndicatorLED13.K@209.649,37.305
LED_IND14: IND1.7 L1_IndicatorLED14.K | length 47.1
  Top Layer w0.254: v1(200.025,25.273) v1(200.025,30.861)
  Bottom Layer w0.254: v1(200.025,25.273) 201.351,23.947 IND1.7@231.973,23.947 ; v1(200.025,30.861) 200.406,31.242 200.406,32.639 199.954,33.091 199.954,34.473 200.232,34.751 cw(c201.335,33.92) 200.504,35.023 201.168,35.687 202.189,35.687 203.309,36.807 203.309,36.882 203.732,37.305 L1_IndicatorLED14.K@203.807,37.305
LED_IND15: IND1.6 L1_IndicatorLED15.K | length 53
  Top Layer w0.254: v1(194.31,25.527) v1(194.31,30.734)
  Bottom Layer w0.254: v1(194.31,25.527) 195.761,24.076 195.768,24.076 196.547,23.297 IND1.6@231.973,23.297 ; v1(194.31,30.734) 194.564,30.988 194.564,32.385 194.056,32.893 194.056,34.544 195.199,35.687 196.347,35.687 197.467,36.807 197.467,36.882 197.89,37.305 L1_IndicatorLED15.K@197.965,37.305
LED_IND16: IND1.5 L1_IndicatorLED16.K | length 60.3
  Bottom Layer w0.254: L1_IndicatorLED16.K@192.123,37.305 192.048,37.305 191.625,36.882 191.625,36.807 190.505,35.687 189.357,35.687 188.214,34.544 188.214,32.893 188.595,32.512 188.595,31.496 188.214,31.115 188.214,24.003 188.776,23.441 191.979,23.441 192.052,23.368 192.151,23.368 192.872,22.647 IND1.5@231.973,22.647
LED_IND17: IND2.20 L1_IndicatorLED17.K | length 60.9
  Top Layer w0.254: v1(182.245,24.257) 182.499,24.511 v1(182.499,30.988)
  Bottom Layer w0.254: IND2.20@138.867,19.599 138.885,19.617 139.915,19.617 143.074,22.777 153.714,22.777 154.378,23.441 160.474,23.441 161.163,24.13 162.433,24.13 162.56,24.003 181.938,24.003 182.192,24.257 v1(182.245,24.257) ; v1(182.499,30.988) 182.499,31.572 182.604,31.677 182.604,33.013 182.482,33.135 182.482,34.47 182.499,34.487 182.499,34.671 183.515,35.687 184.663,35.687 185.783,36.807 185.783,36.882 186.206,37.305 L1_IndicatorLED17.K@186.281,37.305
LED_IND18: IND2.19 L1_IndicatorLED18.K | length 54.2
  Top Layer w0.254: v1(176.53,25.273) v1(176.53,30.988)
  Bottom Layer w0.254: IND2.19@138.867,20.249 138.885,20.267 139.923,20.267 142.896,23.241 153.416,23.241 154.07,23.895 160.166,23.895 160.909,24.638 161.925,24.638 162.56,25.273 v1(176.53,25.273) ; v1(176.53,30.988) 176.762,31.22 176.762,32.363 176.657,32.468 176.657,33.353 176.64,33.37 176.64,34.47 176.657,34.487 176.657,34.671 177.673,35.687 178.821,35.687 179.941,36.807 179.941,36.882 180.364,37.305 L1_IndicatorLED18.K@180.439,37.305
LED_IND19: IND2.18 L1_IndicatorLED19.K | length 46.3
  Top Layer w0.254: v1(168.783,26.543) 170.688,28.448 v1(170.688,30.988)
  Bottom Layer w0.254: IND2.18@138.867,20.899 138.885,20.917 139.93,20.917 142.708,23.695 153.108,23.695 153.797,24.384 159.131,24.384 160.655,25.908 161.29,25.908 161.598,26.216 168.456,26.216 v1(168.783,26.543) ; v1(170.688,30.988) 170.688,31.445 170.92,31.677 170.92,32.363 170.688,32.595 170.688,34.417 171.831,35.56 172.852,35.56 174.099,36.807 174.099,36.882 174.522,37.305 L1_IndicatorLED19.K@174.597,37.305
LED_IND20: IND2.17 L1_IndicatorLED20.K | length 40.8
  Top Layer w0.254: v1(164.719,27.305) 164.719,30.353 164.862,30.496 164.862,30.845 v1(164.846,30.861)
  Bottom Layer w0.254: IND2.17@138.867,21.549 138.885,21.567 139.938,21.567 142.52,24.149 152.92,24.149 153.609,24.838 158.442,24.838 160.909,27.305 v1(164.719,27.305) ; v1(164.846,30.861) 164.846,31.445 165.078,31.677 165.078,32.363 164.846,32.595 164.846,34.544 165.862,35.56 167.01,35.56 168.257,36.807 168.257,36.882 168.68,37.305 L1_IndicatorLED20.K@168.755,37.305
LED_IND21: IND2.16 L1_IndicatorLED21.K | length 36.3
  Top Layer w0.254: v1(158.877,30.988) 158.877,28.321 v1(159.893,27.305)
  Bottom Layer w0.254: IND2.16@138.867,22.199 138.885,22.217 139.946,22.217 142.367,24.638 152.767,24.638 153.421,25.292 158.254,25.292 159.893,26.931 v1(159.893,27.305) ; v1(158.877,30.988) 159.236,31.347 159.236,32.363 159.004,32.595 159.004,34.417 160.274,35.687 161.295,35.687 162.415,36.807 162.415,36.882 162.838,37.305 L1_IndicatorLED21.K@162.913,37.305
LED_IND22: IND2.15 L1_IndicatorLED22.K | length 33
  Top Layer w0.254: v1(155.702,26.035) v1(155.702,31.115)
  Bottom Layer w0.254: IND2.15@138.867,22.849 138.885,22.867 139.954,22.867 142.179,25.092 152.579,25.092 153.233,25.746 155.413,25.746 v1(155.702,26.035) ; v1(155.702,31.115) 155.194,31.115 153.162,33.147 153.162,34.417 154.305,35.56 155.194,35.56 156.516,36.882 156.648,36.882 L1_IndicatorLED22.K@157.071,37.305
LED_IND23: IND2.14 L1_IndicatorLED23.K | length 23.9
  Top Layer w0.254: v1(147.403,28.619) 147.403,31.325 147.828,31.75 v1(147.828,31.877)
  Bottom Layer w0.254: IND2.14@138.867,23.499 139.944,23.499 141.991,25.546 147.212,25.546 147.701,26.035 147.701,28.321 v1(147.403,28.619) ; v1(147.828,31.877) 147.828,32.639 147.32,33.147 147.32,34.417 148.463,35.56 149.409,35.56 151.154,37.305 L1_IndicatorLED23.K@151.229,37.305
LED_IND24: IND2.13 L1_IndicatorLED24.K | length 18.8
  Top Layer w0.254: v1(142.113,31.75) 142.113,28.702 143.256,27.559 v1(143.256,27.178)
  Bottom Layer w0.254: IND2.13@138.867,24.149 139.846,24.149 141.986,26.289 142.367,26.289 v1(143.256,27.178) ; v1(142.113,31.75) 142.113,32.639 141.478,33.274 141.478,34.544 142.621,35.687 143.694,35.687 145.312,37.305 L1_IndicatorLED24.K@145.387,37.305
LED_IND25: IND2.12 L1_IndicatorLED25.K | length 21.4
  Top Layer w0.254: v1(129.613,26.851) 130.556,27.794 130.556,30.79 130.78,31.014 v1(130.982,31.014)
  Bottom Layer w0.254: v1(129.613,26.851) 129.613,26.477 131.941,24.149 IND2.12@133.167,24.149 ; v1(130.982,31.014) 131.008,31.04 132.892,31.04 134.698,32.847 134.828,32.847 135.636,33.655 135.636,34.544 136.779,35.687 137.795,35.687 138.99,36.882 139.122,36.882 L1_IndicatorLED25.K@139.545,37.305
LED_IND26: IND2.11 L1_IndicatorLED26.K | length 19.9
  Top Layer w0.254: v1(128.141,26.934) 129.286,28.079 v1(129.286,30.9)
  Bottom Layer w0.254: v1(128.141,26.934) 128.514,26.934 131.949,23.499 IND2.11@133.167,23.499 ; v1(129.286,30.9) 130.026,31.64 130.026,32.363 129.921,32.468 129.921,33.353 129.904,33.37 129.904,34.654 130.81,35.56 131.958,35.56 133.205,36.807 133.205,36.882 133.628,37.305 L1_IndicatorLED26.K@133.703,37.305
LED_IND27: IND2.10 L1_IndicatorLED27.K | length 22.9
  Top Layer w0.254: v1(124.079,31.217) 124.079,28.067 124.587,27.559 v1(126.873,27.559)
  Bottom Layer w0.254: v1(124.079,31.217) 124.079,31.572 124.184,31.677 124.184,32.796 124.062,32.918 124.062,34.527 125.222,35.687 126.168,35.687 127.786,37.305 L1_IndicatorLED27.K@127.861,37.305 ; v1(126.873,27.559) 126.873,27.391 127.721,26.542 127.721,26.457 127.87,26.308 128.392,26.308 131.851,22.849 IND2.10@133.167,22.849